# Altium PCB RCFU_V2.0.PcbDoc
Units mm, origin at the board's own origin, x right, y up, seen from the top; angles counter-clockwise.
Board outline 80 x 50 mm, 2 copper layers (Top Layer, Bottom Layer), stack 1.58 mm thick; 68 components, 53 nets, 357 pads, 300 vias.
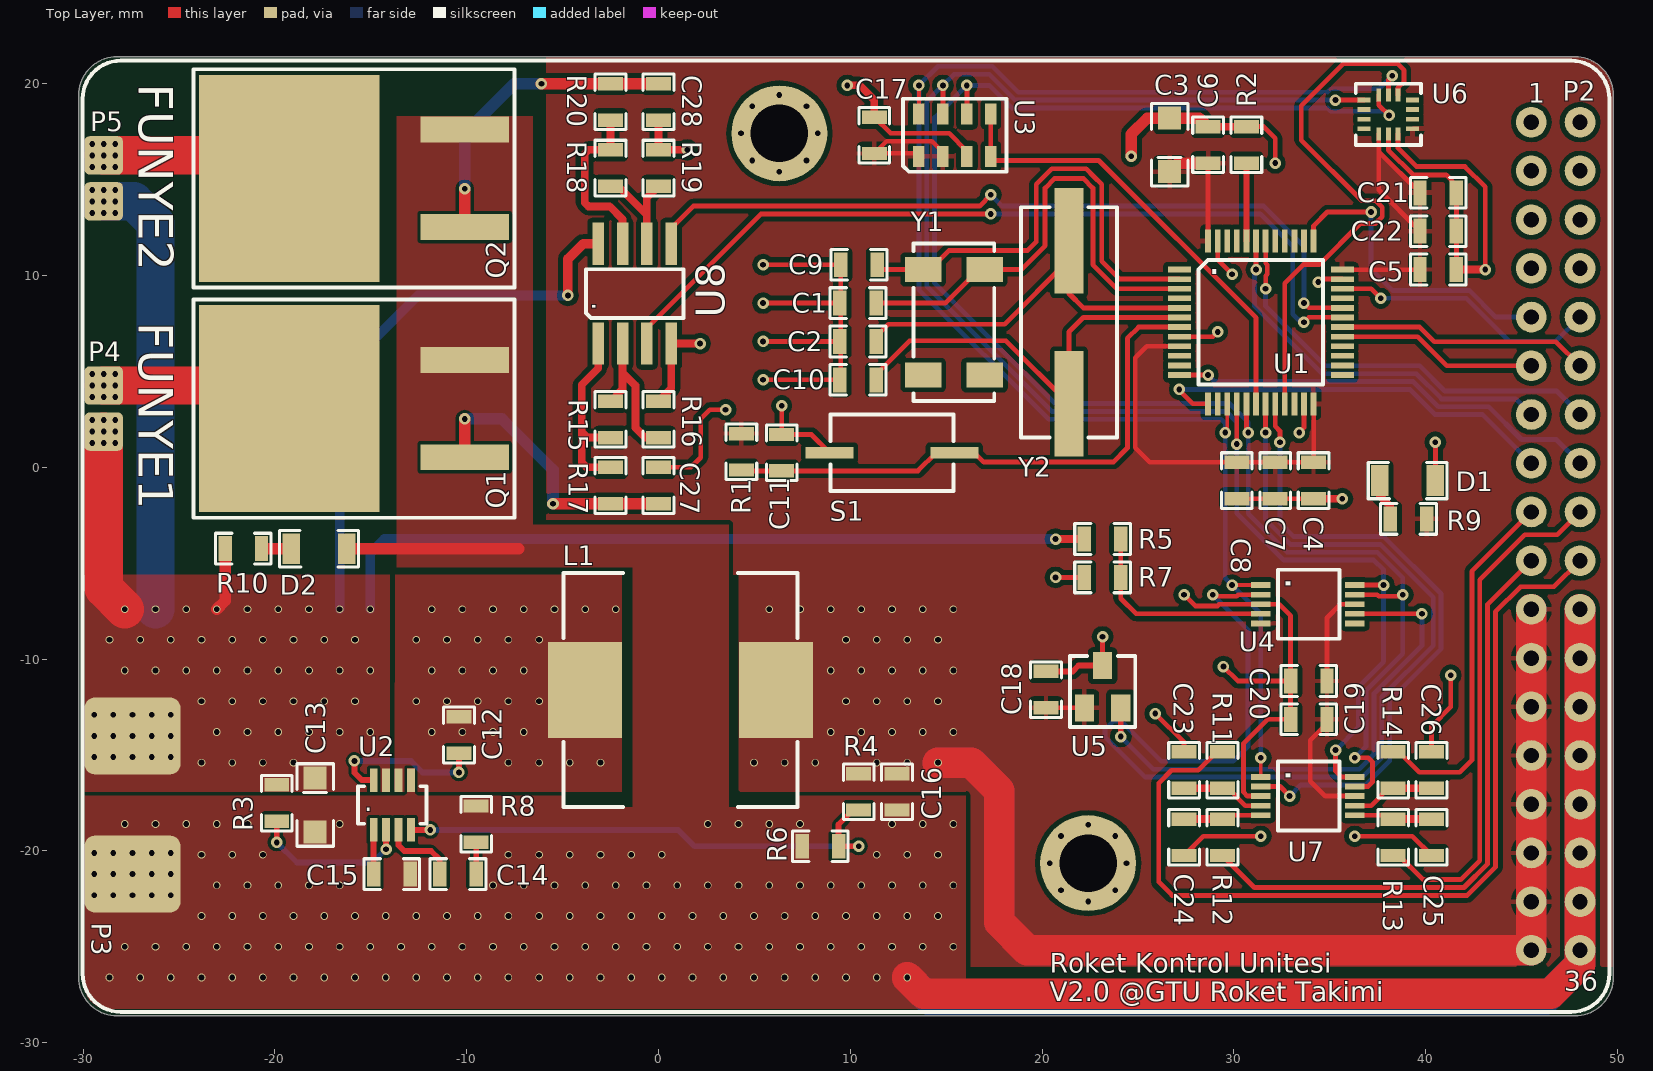
[diagram p0: Top Layer view]
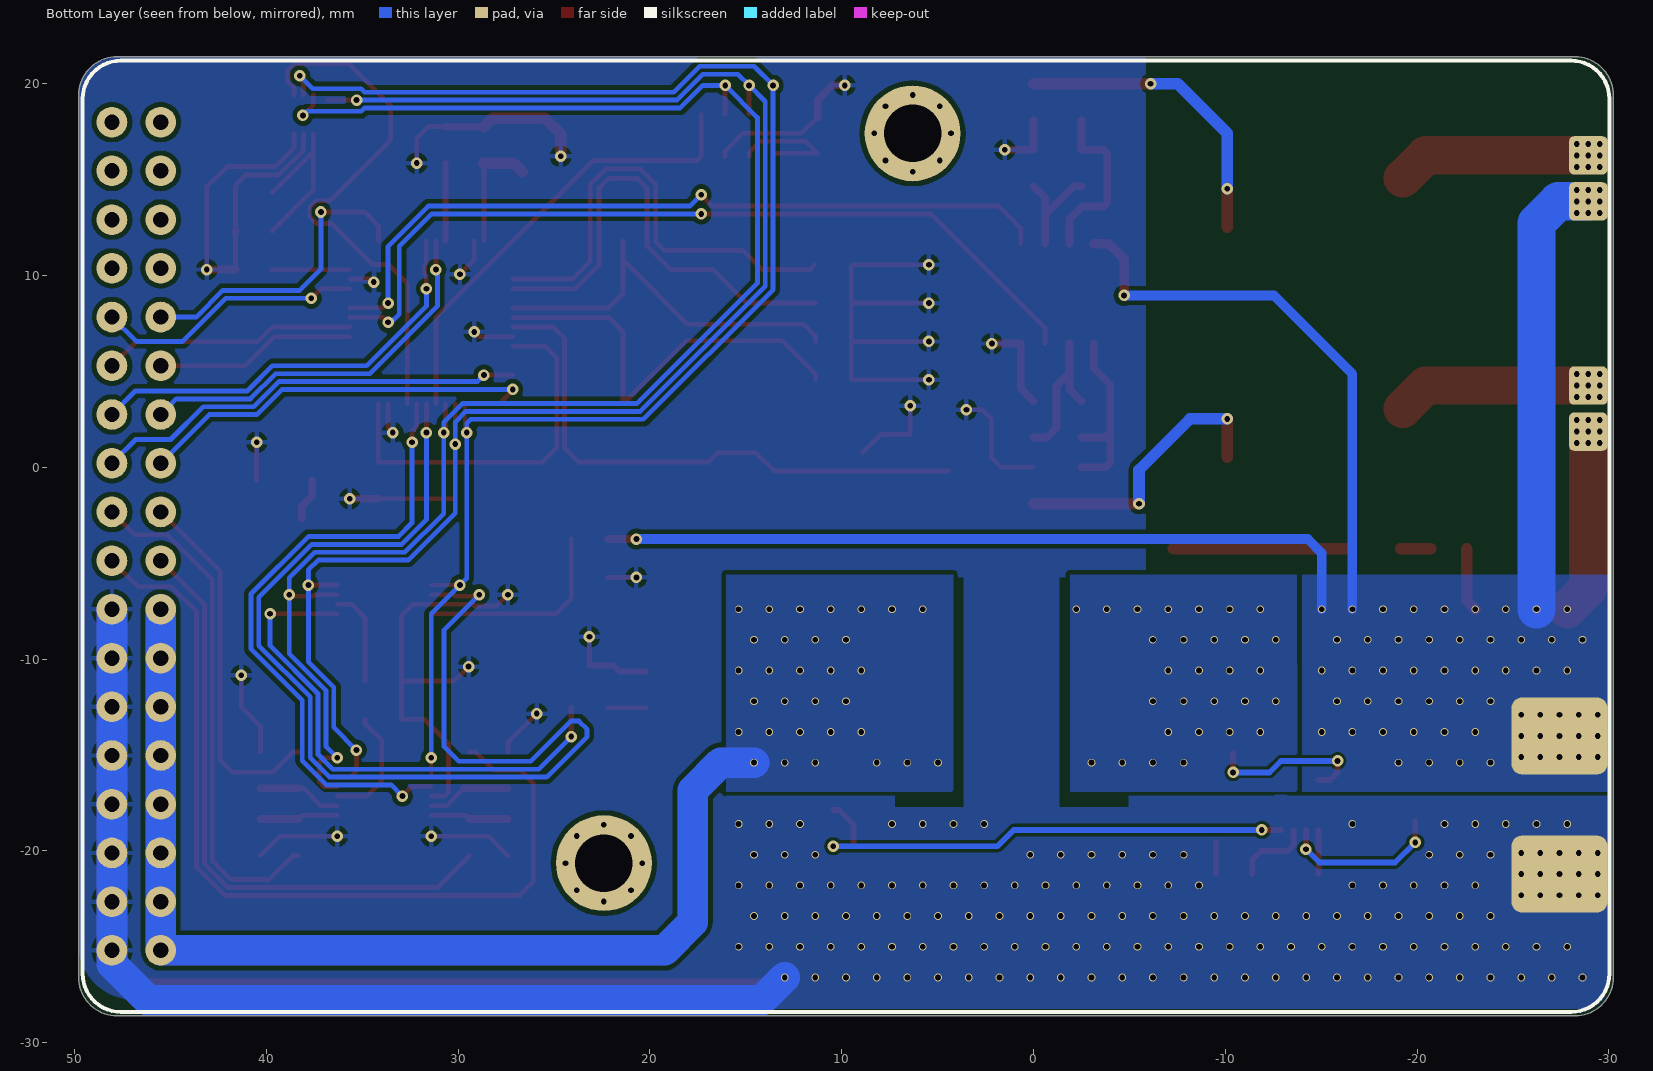
[diagram p1: Bottom Layer view, seen from below]
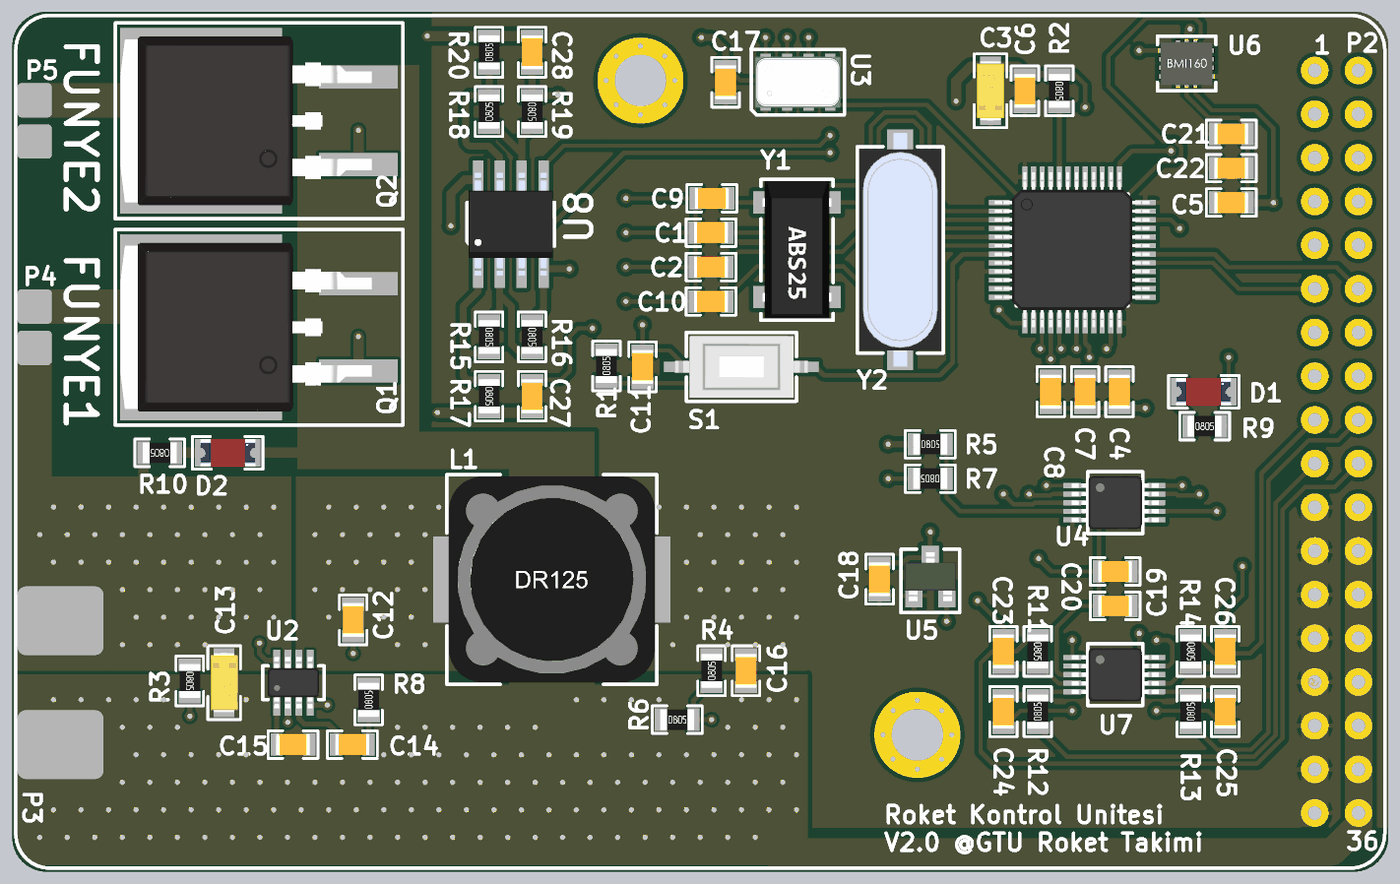
[diagram p2: 3D render of the assembled board from above, using the file's embedded part models]

## Layer stack, top to bottom
Top Solder: solder mask 0.01, Solder Resist, Dk 3.5
Top Layer: signal copper 0.01
Dielectric 1: dielectric 1.56, FR-4, Dk 4.8
Bottom Layer: signal copper 0.01
Bottom Solder: solder mask 0.01, Solder Resist, Dk 3.5

## Board outline
-30.224,-26.598 -30.224,19.402 cw(c-28.224,19.402) -28.224,21.402 47.776,21.402 cw(c47.776,19.402) 49.776,19.402 49.776,-26.598 cw(c47.776,-26.598) 47.776,-28.598 -28.224,-28.598 cw(c-28.224,-26.598)

## Design rules (kind name [scope] priority, off if disabled: settings)
Clearance PlaneCl [InNamedPolygon('gndplane','vccplane')] p1: gap=0.25 ignorepadtopadclearanceinfootprint=FALSE
Clearance [All] p2: gap=0.16 ignorepadtopadclearanceinfootprint=FALSE
Clearance POWER_CLE [InNamedPolygon('VBAT_L01_P018','VSS1_L01_P020','NETC12_2_L01_P022','SENSE_BUS_L01_P024','VSS1_L01_P026','VSS1_L01_P042')] p3: gap=0.2 ignorepadtopadclearanceinfootprint=FALSE
ComponentClearance [All] p1: gap=0 collisioncheckmode=3 verticalgap=2540 showdistances=FALSE
DiffPairsRouting DiffPair_DiffPairsRouting [InDifferentialPair ('OSC_IN')] p1: maxlimit=0.5 minlimit=0.16 mostfreqgap=0.2 toplayer_minwidth=0.16 toplayer_maxwidth=0.5 toplayer_prefwidth=0.3 bottomlayer_minwidth=0.16 bottomlayer_maxwidth=0.5 bottomlayer_prefwidth=0.3 maxuncoupledlength=12.7
DiffPairsRouting [All] p2: maxlimit=0.5 minlimit=0.16 mostfreqgap=0.2 toplayer_minwidth=0.16 toplayer_maxwidth=0.5 toplayer_prefwidth=0.3 bottomlayer_minwidth=0.16 bottomlayer_maxwidth=0.5 bottomlayer_prefwidth=0.3 maxuncoupledlength=12.7
PolygonConnect POWER_POL [All vs IsNamedPolygon('VBAT_L01_P018','VSS1_L01_P020','NETC12_2_L01_P022','SENSE_BUS_L01_P024','VSS1_L01_P026','VSS1_L01_P042')] p1: connectstyle=Direct reliefconductorwidth=0.254 reliefentries=4 polygonreliefangle="90 Angle" airgapwidth=0.254
PolygonConnect [All] p2: connectstyle=Relief reliefconductorwidth=0.254 reliefentries=4 polygonreliefangle="90 Angle" airgapwidth=0.254
RoutingTopology [All] p1: topology=Daisy_Balanced
RoutingVias [All] p1: holewidth=0.4 width=0.8 viastyle="Through Hole" minholewidth=0.3 minwidth=0.6 maxholewidth=2 maxwidth=4
SolderMaskExpansion [All] p1: expansion=0
Width [All] p1: maxlimit=5 minlimit=0.16 preferedwidth=0.3
27 further rules are at their usual default settings.

## Classes and differential pairs
component class RFCU_V2.0: P2
component class Sensor: C17 C18 C19 C20 C21 C22 C23 C24 C25 C26 R11 R12 R13 R14 U3 U4 U5 U6 U7
component class Power: C12 C13 C14 C15 C16 D1 D2 D? L1 P3 R3 R4 R5 R6 R7 R8 R9 R10 R? U2
component class MCU: C1 C2 C3 C4 C5 C6 C7 C8 C9 C10 C11 R1 R2 S1 U1 Y1 Y2
component class Ejection: C27 C28 P4 P5 Q1 Q2 R15 R16 R17 R18 R19 R20 U8

## Components (designator, comment, footprint, x,y, rotation, side; value= is the part's Value field where it differs from the comment)
C1 "Cap" 0805-CAP 10.402,8.559 r180 top value=100nF
C2 "Cap" 0805-CAP 10.402,6.559 r180 top value=100nF
C3 "Cap Pol1" "Tantalum A-Case" 26.652,16.809 r90 top value=4.7uF
C4 "Cap" 0805-CAP 34.152,-0.691 r90 top value=100nF
C5 "Cap" 0805-CAP 40.652,10.309 r180 top value=100nF
C6 "Cap" 0805-CAP 28.652,16.809 r270 top value=100nF
C7 "Cap" 0805-CAP 32.152,-0.691 r90 top value=100nF
C8 "Cap" 0805-CAP 30.152,-0.691 r90 top value=1uF
C9 "Cap" 0805-CAP 10.452,10.559 r180 top value=100nF
C10 "Cap" 0805-CAP 10.402,4.559 r180 top value=100nF
C11 "Cap" 0805-CAP 6.422,0.759 r270 top value=1uF
C12 "Cap" 0805-CAP -10.403,-13.958 r90 top value=3.3nF
C13 "Cap Pol1" "Tantalum A-Case" -17.903,-17.608 r270 top value=10uF
C14 "Cap" 0805-CAP -10.453,-21.208 r0 top value=3.3nF
C15 "Cap" 0805-CAP -13.903,-21.208 r0 top value=0.1uF
C16 "Cap" 0805-CAP 12.437,-16.918 r270 top value=3.3nF
C17 "Cap" 0805-CAP 11.252,17.309 r90 top value=100nF
C18 "Cap" 0805-CAP 20.202,-11.591 r90 top value=0.1uF
C19 "Cap" 0805-CAP 33.902,-13.141 r180 top value=0.1uF
C20 "Cap" 0805-CAP 33.902,-11.141 r180 top value=0.1uF
C21 "Cap" 0805-CAP 40.652,14.309 r0 top value=100nF
C22 "Cap" 0805-CAP 40.652,12.309 r0 top value=100nF
C23 "Cap" 0805-CAP 27.402,-15.791 r90 top value=100nF
C24 "Cap" 0805-CAP 27.402,-19.291 r270 top value=100nF
C25 "Cap" 0805-CAP 40.302,-19.291 r270 top value=100nF
C26 "Cap" 0805-CAP 40.302,-15.791 r90 top value=100nF
C27 "Cap" 0805-CAP 0,-0.95 r270 top value=10uF
C28 "Cap" 0805-CAP 0,19.05 r90 top value=10uF
D1 "LED0" "1206-LED RED" 39.052,-0.691 r0 top
D2 "LED0" "1206-LED RED" -17.698,-4.241 r0 top
L1 "Inductor" DR125 1.147,-11.608 r0 top value=10uH
P2 "Header 18X2" "2X18 2.54mm Headers" 46.776,-3.598 r0 top locked
P3 "BatteryIn" "Battery 1" -27.423,-17.608 r90 top
P4 "Header 2" "Battery 2" -28.923,3.06 r270 top
P5 "Header 2" "Battery 2" -28.923,15.06 r270 top
Q1 "IRF540" TO-263-AA -10.1,3.06 r90 top
Q2 "IRF540" TO-263-AA -10.1,15.06 r90 top
R1 "Res1" 0805-RES 4.322,0.809 r90 top value=10K
R2 "Res1" 0805-RES 30.652,16.809 r270 top value=10K
R3 "Res1" 0805-RES -19.903,-17.508 r270 top value=100K
R4 "Res1" 0805-RES 10.437,-16.918 r90 top value=26.1k
R5 "Res1" 0805-RES 23.152,-3.741 r0 top value=1K
R6 "Res1" 0805-RES 8.437,-19.758 r0 top value=10k
R7 "Res1" 0805-RES 23.152,-5.741 r180 top value=1K
R8 "Res1" 0805-RES -9.503,-18.608 r90 top value=5.6k
R9 "Res1" 0805-RES 39.102,-2.691 r0 top value=1K
R10 "Res1" 0805-RES -21.648,-4.241 r180 top value=1K
R11 "Res1" 0805-RES 29.402,-15.791 r270 top value=10k
R12 "Res1" 0805-RES 29.402,-19.291 r90 top value=10k
R13 "Res1" 0805-RES 38.302,-19.291 r90 top value=10k
R14 "Res1" 0805-RES 38.302,-15.791 r270 top value=10k
R15 "Res1" 0805-RES -2.5,2.5 r270 top value=10k
R16 "Res1" 0805-RES 0,2.5 r270 top value=10k
R17 "Res1" 0805-RES -2.5,-0.95 r270 top value=10k
R18 "Res1" 0805-RES -2.5,15.6 r90 top value=10k
R19 "Res1" 0805-RES 0,15.6 r270 top value=10k
R20 "Res1" 0805-RES -2.5,19.05 r90 top value=10k
S1 "SW-PB" "3x6x2.5mm Tacticle Push Button" 12.172,0.759 r180 top
U1 "STM32F103C8T6" LQFP-48 31.402,7.559 r0 top locked
U2 "MP1472" TSOP-23 -13.878,-17.608 r0 top
U3 "MS5611" MS5611-01BA03 15.452,17.309 r90 top
U4 "ADS1118" MSOP10 33.902,-7.141 r270 top
U5 "MCP9700" "SOT23-3 (TO-236AB)" 23.152,-11.441 r0 top
U6 "BMI160 IMU Sensor" BMI160 38.052,18.397 r0 top
U7 "ADS1118" MSOP10 33.902,-17.141 r270 top
U8 "LM358" SOIC-8 -1.24,9.05 r90 top
Y1 "32.768 kHz" "MC-306 SMD" 15.402,7.559 r270 top
Y2 "8 MHz" "HC49 Crystal SMD" 21.402,7.559 r270 top

## Footprints (in the part's own frame and the unit in brackets; to place one, negate y for a bottom-side part, rotate by r counter-clockwise, add the part's x,y. Pads: shape width x height; smd on the part's side, far side on the other; paste and mask are expansions set on the pad)
"2X18 2.54mm Headers" [mm] "2X18 2.54mm Headers"
  round 1.6 hole 0.8: 1(-1.27,21.59) 2(1.27,21.59) 3(-1.27,19.05) 4(1.27,19.05) 5(-1.27,16.51) 6(1.27,16.51) 7(-1.27,13.97) 8(1.27,13.97) 9(-1.27,11.43) 10(1.27,11.43) 11(-1.27,8.89) 12(1.27,8.89) 13(-1.27,6.35) 14(1.27,6.35) 15(-1.27,3.81) 16(1.27,3.81) 17(-1.27,1.27) 18(1.27,1.27) 19(-1.27,-1.27) 20(1.27,-1.27) 21(-1.27,-3.81) 22(1.27,-3.81) 23(-1.27,-6.35) 24(1.27,-6.35) 25(-1.27,-8.89) 26(1.27,-8.89) 27(-1.27,-11.43) 28(1.27,-11.43) 29(-1.27,-13.97) 30(1.27,-13.97) 31(-1.27,-16.51) 32(1.27,-16.51) 33(-1.27,-19.05) 34(1.27,-19.05) 35(-1.27,-21.59) 36(1.27,-21.59)
"3x6x2.5mm Tacticle Push Button" [mm]
  rect 2.5x0.6 smd: 1(-3.25,0) 2(3.25,0)
  silkscreen extent -3.2,-2 3.2,2, body extent -3.89,-1.79 3.89,1.79, height 2.54
0805-CAP [mm]
  rect 0.7x1.3 smd: 1(-0.95,0) 2(0.95,0)
  silkscreen extent -1.45,-0.8 1.45,0.8, body extent -1,-0.62 1,0.63, height 0.85
0805-RES [mm]
  rect 0.7x1.3 smd: 1(-0.95,0) 2(0.95,0)
  silkscreen extent -1.45,-0.8 1.45,0.8, body extent -1,-0.6 1,0.6, height 0.4
"1206-LED RED" [mm]
  rect 0.9x1.6 smd: 1(-1.45,0) 2(1.45,0)
  silkscreen extent -2.05,-0.95 2.05,0.95, body extent -1.6,-0.8 1.6,0.8, height 1.11
"Battery 1" [mm] "Battery 1"
  round 0.4 hole 0.3: 1(-4.7,-2) 1(-4.7,-1) 1(-4.7,0) 1(-4.7,1) 1(-4.7,2) 1(-3.6,-2) 1(-3.6,-1) 1(-3.6,0) 1(-3.6,1) 1(-3.6,2) 1(-2.5,-2) 1(-2.5,-1) 1(-2.5,0) 1(-2.5,1) 1(-2.5,2) 2(2.5,-2) 2(2.5,-1) 2(2.5,0) 2(2.5,1) 2(2.5,2) 2(3.6,-2) 2(3.6,-1) 2(3.6,0) 2(3.6,1) 2(3.6,2) 2(4.7,-2) 2(4.7,-1) 2(4.7,0) 2(4.7,1) 2(4.7,2)
  rrect25% 4x5 smd: 1(-3.6,0) 2(3.6,0)
  rrect25% 4x5 smd far side: 1(-3.6,0) 2(3.6,0)
"Battery 2" [mm] "Battery 1"
  round 0.4 hole 0.3: 1(-1.8,-0.6) 1(-1.8,0) 1(-1.8,0.6) 1(-1.2,0.6) 1(-1.2,0) 1(-1.2,-0.6) 1(-0.6,0.6) 1(-0.6,0) 1(-0.6,-0.6) 2(0.6,0.6) 2(0.6,0) 2(0.6,-0.6) 2(1.2,0.6) 2(1.2,0) 2(1.2,-0.6) 2(1.8,-0.6) 2(1.8,0) 2(1.8,0.6)
  rrect25% 2x2 smd: 1(-1.2,0) 2(1.2,0)
  rrect25% 2x2 smd far side: 1(-1.2,0) 2(1.2,0)
BMI160 [mm] "BMI160 Bosch IMU Sensor"
  rect 0.675x0.25 smd mask+0.05: 1(-1.262,0.75) 2(-1.262,0.25) 3(-1.262,-0.25) 4(-1.262,-0.75) 8(1.262,-0.75) 9(1.262,-0.25) 10(1.262,0.25) 11(1.262,0.75)
  rect 0.25x0.675 smd mask+0.05: 5(-0.5,-1.012) 6(0,-1.012) 7(0.5,-1.012) 12(0.5,1.012) 13(0,1.012) 14(-0.5,1.012)
  silkscreen extent -1.7,-1.6 1.7,1.6, body extent -1.5,-1.25 1.5,1.25, height 0.83
DR125 [mm] "DR125 Series"
  rect 3.85x5 smd: 1(-4.975,0) 2(4.975,0)
  silkscreen extent -6.1,-6.1 6.1,6.1, body extent -6,-6 6,6, height 5.92
"HC49 Crystal SMD" [mm]
  rect 5.5x1.5 smd: 1(-4.25,0) 2(4.25,0)
  silkscreen extent -6,-2.5 6,2.5, body extent -6.79,-2.4 6.79,2.4, height 3.85
LQFP-48 [mm] "48 Pin LQPF Package"
  rect 1.2x0.3 smd: 1(-4.25,2.75) 2(-4.25,2.25) 3(-4.25,1.75) 4(-4.25,1.25) 5(-4.25,0.75) 6(-4.25,0.25) 7(-4.25,-0.25) 8(-4.25,-0.75) 9(-4.25,-1.25) 10(-4.25,-1.75) 11(-4.25,-2.25) 12(-4.25,-2.75) 25(4.25,-2.75) 26(4.25,-2.25) 27(4.25,-1.75) 28(4.25,-1.25) 29(4.25,-0.75) 30(4.25,-0.25) 31(4.25,0.25) 32(4.25,0.75) 33(4.25,1.25) 34(4.25,1.75) 35(4.25,2.25) 36(4.25,2.75)
  rect 0.3x1.2 smd: 13(-2.75,-4.25) 14(-2.25,-4.25) 15(-1.75,-4.25) 16(-1.25,-4.25) 17(-0.75,-4.25) 18(-0.25,-4.25) 19(0.25,-4.25) 20(0.75,-4.25) 21(1.25,-4.25) 22(1.75,-4.25) 23(2.25,-4.25) 24(2.75,-4.25) 37(2.75,4.25) 38(2.25,4.25) 39(1.75,4.25) 40(1.25,4.25) 41(0.75,4.25) 42(0.25,4.25) 43(-0.25,4.25) 44(-0.75,4.25) 45(-1.25,4.25) 46(-1.75,4.25) 47(-2.25,4.25) 48(-2.75,4.25)
  silkscreen extent -3.25,-3.25 3.25,3.25, body extent -4.5,-4.5 4.5,4.5, height 1.5
"MC-306 SMD" [mm] "MC-306 Crystal"
  rect 1.3x1.9 smd: 1(-2.75,-1.6) 2(2.75,-1.6) 3(2.75,1.6) 4(-2.75,1.6)
  silkscreen extent -4.1,-2.1 4.1,2.1, body extent -4,-2 4,2, height 2.66
MS5611-01BA03 [mm] "MS5611 Barometer Sensor I2C-SPI"
  rect 1.1x0.6 smd: 1(-1.1,1.875) 2(-1.1,0.625) 3(-1.1,-0.625) 4(-1.1,-1.875) 5(1.1,-1.875) 6(1.1,-0.625) 7(1.1,0.625) 8(1.1,1.875)
  silkscreen extent -1.9,-2.7 1.9,2.7, body extent -1.5,-2.5 1.5,2.5, height 1
MSOP10 [mm] "MSOP 10 Pin Package"
  rect 0.3x1.02 smd: 1(-1,-2.5) 2(-0.5,-2.5) 3(0,-2.5) 4(0.5,-2.5) 5(1,-2.5) 6(1,2.4) 7(0.5,2.4) 8(0,2.4) 9(-0.5,2.4) 10(-1,2.4)
  silkscreen extent -1.8,-1.6 1.8,1.6, body extent -1.55,-2.52 1.55,2.53, height 1.05
SOIC-8 [mm] "SOIC-8 Package"
  rect 2.2x0.6 smd: 1(-2.6,1.905) 2(-2.6,0.635) 3(-2.6,-0.635) 4(-2.6,-1.905) 5(2.6,-1.905) 6(2.6,-0.635) 7(2.6,0.635) 8(2.6,1.905)
  silkscreen extent -1.27,-2.54 1.27,2.54, body extent -3,-2.45 3,2.45, height 1.5
"SOT23-3 (TO-236AB)" [mm] "SOT23 3 Pin"
  rect 1x1.4 smd: 1(-0.95,-1.1) 2(0.95,-1.1) 3(0,1.1)
  silkscreen extent -1.7,-2.1 1.7,1.6, body extent -1.5,-1.42 1.5,1.42, height 1.2
"Tantalum A-Case" [mm] "Tantalum A-Case"
  rect 1.2x1.2 smd: 1(-1.4,0) 2(1.4,0)
  silkscreen extent -2.15,-0.95 2.15,0.95, body extent -1.73,-0.8 1.73,0.8, height 1.64
TO-263-AA [mm] "TO-263-AA Package"
  rect 10.8x9.4 smd: 1(0,9.15)
  rect 1.35x4.6 smd: 2(-2.54,0) 3(2.54,0)
  silkscreen extent -5.69,-2.6 5.69,14.14, body extent -4.91,-0.77 4.91,13.83, height 4.22
TSOP-23 [mm] "TSOP-23 8 Pin Package"
  rect 0.4x1.22 smd: 1(-0.975,-1.3) 2(-0.325,-1.3) 3(0.325,-1.3) 4(0.975,-1.3) 5(0.975,1.3) 6(0.325,1.3) 7(-0.325,1.3) 8(-0.975,1.3)
  silkscreen extent -1.79,-0.97 1.79,0.97, body extent -1.5,-1.5 1.5,1.5, height 1.1

## Part data
C1 C2 C4 C5 C6 C7 C8 C9 C10 C11 C12 C14 C15 C16 C17 C18 C19 C20 C21 C22 C23 C24 C25 C26 C27 C28: "Capacitor", LatestRevisionDate=17-Jul-2002, LatestRevisionNote="Re-released for DXP Platform.", PackageDescription="Radial Cap, Thru-Hole; 2 Leads; 0.3 in Pin Spacing", PackageReference=RAD-0.3, Published=8-Jun-2000, Publisher="Altium Limited"
C3 C13: "Polarized Capacitor (Radial)", LatestRevisionDate=17-Jul-2002, LatestRevisionNote="Re-released for DXP Platform.", PackageDescription="Polarized Capacitor (Radial); 2 Leads", PackageReference=RB7.6-15, Published=8-Jun-2000, Publisher="Altium Limited"
D1 D2: "Typical INFRARED GaAs LED", LatestRevisionDate=08-Jul-2005, LatestRevisionNote="Mech Layer 1 removed.", PackageDescription="LED; 2 Leads", PackageReference=LED-0, Published=8-Jun-2000, Publisher="Altium Limited"
P2: "Header, 18-Pin, Dual row", LatestRevisionDate=17-Jul-2002, LatestRevisionNote="Re-released for DXP Platform.", Publisher="Altium Limited"
P3: library part "Header 2", "Header, 2-Pin", LatestRevisionDate=17-Jul-2002, LatestRevisionNote="Re-released for DXP Platform.", Publisher="Altium Limited"
P4 P5: "Header, 2-Pin", LatestRevisionDate=17-Jul-2002, LatestRevisionNote="Re-released for DXP Platform.", Publisher="Altium Limited"
Q1 Q2: library part MOSFET-N, "N-Channel MOSFET", LatestRevisionDate=17-Jul-2002, LatestRevisionNote="Re-released for DXP Platform.", PackageDescription="TO, Flat Index; 3 In-Line, Axial Leads; Body Dia. 4.6mm; Lead Dia. 0.5 mm (max)", PackageReference=E3, PackageVersion=1995/1996, Published=8-Jun-2000, Publisher="Altium Limited"
R1 R2 R3 R4 R5 R6 R7 R8 R9 R10 R11 R12 R13 R14 R15 R16 R17 R18 R19 R20: "Resistor", LatestRevisionDate=17-Jul-2002, LatestRevisionNote="Re-released for DXP Platform.", PackageDescription="Axial Device, Thru-Hole; 2 Leads; 0.3 in Pin Spacing", PackageReference=AXIAL-0.3, Published=8-Jun-2000, Publisher="Altium Limited"
S1: "Switch", LatestRevisionDate=17-Jul-2002, LatestRevisionNote="Re-released for DXP Platform.", PackageDescription="Switch; 2 Leads", PackageReference=SPST-2, Published=24-Mar-1999, Publisher="Altium Limited"
U1: library part STM32F103C8T6-LQPF48, "STM32F103C8T6 LQPF-48"
U2: "MP1472 2A 18V Step-Down Conventor"
U3: "MS5611 Barometer I2C/SPI"
U4 U7: "ADS1118 SPI 4 Channel ADC"
U5: "MCP9700 Linear Temperature Sensor"
U6: "BoschTech BMI160 6 Axis IMU Sensor"
U8: "LM358 OPAMP"
Y1 Y2: library part XTAL, "Crystal Oscillator", LatestRevisionDate=17-Jul-2002, LatestRevisionNote="Re-released for DXP Platform.", PackageDescription="Crystal, Thru-Hole; 2 Leads; Body 3.1 x 8.2 mm (Dia.xH)", PackageReference=R38, Published=8-Jun-2000, Publisher="Altium Limited"
L1: Code_IEC=1005, Code_JEITA=0402, LatestRevisionDate=29-May-2009, LatestRevisionNote="IPC-7351 Footprint Added.", PackageDescription="Chip Inductor", PackageReference=0402-A, Published=8-Jun-2000, Publisher="Altium Limited"

## Free pads (board coordinates)
  round 0.4 hole 0.3: ""(4.302,17.409) ""(4.888,15.995) ""(4.888,18.823) ""(6.302,15.409) ""(6.302,19.409) ""(7.716,15.995) ""(7.716,18.823) ""(8.302,17.409) ""(20.402,-20.641) ""(20.988,-22.055) ""(20.988,-19.227) ""(22.402,-22.641) ""(22.402,-18.641) ""(23.816,-22.055) ""(23.816,-19.227) ""(24.402,-20.641)
  round 5 hole 3: ""(6.302,17.409) ""(22.402,-20.641)

## Via types
v1: diameter 0.4, hole 0.3, Top Layer to Bottom Layer, 229 vias
v2: diameter 0.6, hole 0.3, Top Layer to Bottom Layer, 71 vias

## Nets (pads, with @x,y where several pads share a name; then routed paths per layer and width w, separated by ;. In a path a pad name is that pad's centre, name@x,y a point inside that pad or via, vN(x,y) a via of type N, cw(c..) or ccw(c..) an arc to the next point about the centre after c; other vN are vias at no path point)
ADCIN_0: P2.20 R11.1 | length 46.4
  Top Layer w0.25: R11.1 29.102,-14.841 28.145,-15.798 26.745,-15.798 26.076,-16.467 26.076,-21.615 26.779,-22.318 42.165,-22.318 43.636,-20.847 43.636,-7.538 44.946,-6.228 46.686,-6.228 P2.20
ADCIN_1: P2.19 R12.1 | length 31.8
  Top Layer w0.25: R12.1 31.069,-21.908 41.995,-21.908 43.226,-20.678 43.226,-7.148 P2.19
ADCIN_2: P2.18 R13.1 | length 26.8
  Top Layer w0.25: R13.1 38.602,-20.241 39.859,-21.498 41.826,-21.498 42.816,-20.508 42.816,-5.868 45.166,-3.518 46.856,-3.518 P2.18
ADCIN_3: P2.17 R14.1 | length 19
  Top Layer w0.25: R14.1 38.602,-14.841 39.659,-15.898 41.776,-15.898 42.406,-15.268 42.406,-5.428 P2.17
ADCOUT_0: C23.1 R11.2 U7.4 | length 4.4
  Top Layer w0.25: R11.2@29.702,-16.741 30.602,-17.641 U7.4
  Top Layer w0.4: C23.1 R11.2 R11.2@29.702,-16.741
ADCOUT_1: C24.1 R12.2 U7.5 | length 4.1
  Top Layer w0.25: R12.2 29.602,-18.141 U7.5
  Top Layer w0.4: C24.1 R12.2
ADCOUT_2: C25.1 R13.2 U7.6 | length 4.1
  Top Layer w0.25: U7.6 38.102,-18.141 R13.2
  Top Layer w0.4: R13.2 C25.1
ADCOUT_3: C26.1 R14.2 U7.7 | length 4.4
  Top Layer w0.25: U7.7 37.152,-17.641 38.052,-16.741 R14.2
  Top Layer w0.4: R14.2 C26.1
Batt: R5.2 R7.1 U4.4 | length 10.7
  Top Layer w0.25: R5.2 R7.1 24.102,-6.841 24.902,-7.641 U4.4
BOOT0: R2.2 U1.44 | length 4
  Top Layer w0.3: U1.44 R2.2
CS1: U1.18 U3.4 U3.5 | length 24
  Top Layer w0.25: U3.5 U3.4 17.547,15.989 20.316,15.989 20.321,15.994 22.957,15.994 31.152,7.799 U1.18
CS2: U1.19 U4.2 | length 62.1
  Top Layer w0.25: v2(28.902,-6.641) 28.987,-6.726 30.144,-6.726 30.229,-6.641 U4.2 ; v2(31.652,1.809) U1.19
  Bottom Layer w0.25: v2(28.902,-6.641) 30.732,-8.471 30.732,-14.561 29.962,-15.331 26.222,-15.331 24.122,-13.231 23.702,-13.231 23.272,-13.661 23.272,-14.038 25.385,-16.151 36.699,-16.151 37.712,-15.138 37.712,-11.97 40.387,-9.295 40.387,-6.776 37.632,-4.021 32.942,-4.021 31.652,-2.731 v2(31.652,1.809)
CS3: U1.20 U7.2 | length 33.7
  Top Layer w0.25: U7.2 32.402,-16.641 v2(32.902,-17.141) ; U1.20 32.152,2.136 32.402,1.886 v2(32.402,1.309)
  Bottom Layer w0.25: v2(32.402,1.309) 32.402,-2.901 33.111,-3.611 37.802,-3.611 40.797,-6.606 40.797,-9.465 38.122,-12.14 38.122,-15.308 36.869,-16.561 33.482,-16.561 v2(32.902,-17.141)
CS4: U1.21 U6.12 | length 28.6
  Top Layer w0.25: U1.21 32.652,9.599 33.622,10.569 34.452,10.569 36.592,12.709 37.379,12.709 37.737,13.067 37.737,13.551 37.394,13.894 36.677,13.894 33.512,17.059 33.512,18.849 35.702,21.039 38.532,21.039 38.872,20.699 38.872,20.099 38.552,19.779 U6.12
LoadIN: C13.1 P3.2 P4.2 P5.2 R3.1 R5.1 R10.2 U2.7 U8.8 | length 106.5
  Top Layer w0.4: v2(20.702,-3.741) R5.1
  Top Layer w0.5: v2(-4.723,8.957) -4.723,10.857 -3.93,11.65 U8.8
  Top Layer w0.6: v1(-23.025,-7.398) -22.598,-6.971 R10.2
  Top Layer w2: P4.2@-28.923,1.86 -28.923,-6.3 v1(-27.825,-7.398)
  Bottom Layer w0.5: v1(-16.625,-7.398) -16.625,4.87 -12.538,8.957 v2(-4.723,8.957) ; v1(-15.025,-7.398) -15.025,-4.468 -14.298,-3.741 v2(20.702,-3.741)
  Bottom Layer w2: P5.2@-28.923,13.86 -28.323,13.86 -27.35,13.86 -26.225,12.735 v1(-26.225,-7.398)
  other v1: -23.825,-15.398 -22.225,-15.398 -20.625,-15.398 -19.025,-15.398 -23.025,-13.798 -21.425,-13.798 -19.825,-13.798 -18.225,-13.798 -16.625,-13.798 -15.025,-13.798 -23.825,-12.198 -22.225,-12.198 -20.625,-12.198 -19.025,-12.198 -17.425,-12.198 -15.825,-12.198 -27.825,-10.598 -26.225,-10.598 -24.625,-10.598 -23.025,-10.598 -21.425,-10.598 -19.825,-10.598 -18.225,-10.598 -16.625,-10.598 -15.025,-10.598 -28.625,-8.998 -27.025,-8.998 -25.425,-8.998 -23.825,-8.998 -22.225,-8.998 -20.625,-8.998 -19.025,-8.998 -17.425,-8.998 -15.825,-8.998 -24.625,-7.398 -21.425,-7.398 -19.825,-7.398 -18.225,-7.398
LoadOUT_1: P5.1 Q2.1 | length 10.2
  Top Layer w2: P5.1@-28.923,16.26 -28.323,16.26 -20.45,16.26 Q2.1
LoadOUT_2: P4.1 Q1.1 | length 10.2
  Top Layer w2: P4.1@-28.923,4.26 -28.323,4.26 -20.45,4.26 Q1.1
MISO: U1.16 U3.7 U4.10 U6.1 U7.10 | length 84
  Top Layer w0.25: U3.7 v2(14.827,19.909) ; v2(30.152,1.209) U1.16 ; v2(35.302,-14.741) 35.302,-15.841 35.602,-16.141 U7.10 ; v2@35.377,19.209 35.439,19.147 U6.1 ; U4.10 v2(37.802,-6.141)
  Bottom Layer w0.25: v2(35.289,19.147) 18.589,19.147 17.242,20.494 15.412,20.494 v2(14.827,19.909) 13.987,19.069 13.987,9.434 20.512,2.909 29.602,2.909 30.152,2.359 v2(30.152,1.209) 30.152,-2.391 32.602,-4.841 37.292,-4.841 37.802,-5.351 v2(37.802,-6.141) 37.802,-10.141 36.482,-11.461 36.482,-13.561 v2(35.302,-14.741)
MOSI: U1.17 U3.6 U4.9 U6.14 U7.9 | length 87.6
  Top Layer w0.25: U3.6 v2(16.077,19.909) ; U1.17 30.652,1.909 v2(30.752,1.809) ; U7.9 37.002,-16.641 37.222,-16.421 37.222,-15.361 37.002,-15.141 v2(36.302,-15.141) ; U4.9 37.475,-6.641 37.56,-6.726 38.717,-6.726 v2(38.802,-6.641) ; U6.14 37.552,18.884 v2(38.089,18.347)
  Bottom Layer w0.25: v2(36.302,-15.141) 36.892,-14.551 36.892,-11.631 38.802,-9.721 v2(38.802,-6.641) 38.802,-5.771 37.462,-4.431 32.772,-4.431 30.752,-2.411 v2(30.752,1.809) 30.752,2.339 29.772,3.319 20.682,3.319 14.397,9.604 14.397,18.229 v2(16.077,19.909) 17.247,19.909 18.42,18.737 34.872,18.737 35.047,18.562 37.874,18.562 v2(38.089,18.347)
NetC12_1: C12.1 U2.8 | length 8.5
  Top Layer w0.3: v2(-15.853,-15.308) -15.853,-15.928 -15.473,-16.308 U2.8 ; v2(-10.403,-15.908) C12.1
  Bottom Layer w0.3: v2(-15.853,-15.308) -12.903,-15.308 -12.303,-15.908 v2(-10.403,-15.908)
NetC12_2: C12.2 L1.1 U2.6
  other v1: -7.825,-15.398 -6.225,-15.398 -4.625,-15.398 -3.025,-15.398 -11.825,-13.798 -10.225,-13.798 -8.625,-13.798 -7.025,-13.798 -12.625,-12.198 -11.025,-12.198 -9.425,-12.198 -7.825,-12.198 -6.225,-12.198 -11.825,-10.598 -10.225,-10.598 -8.625,-10.598 -7.025,-10.598 -12.625,-8.998 -11.025,-8.998 -9.425,-8.998 -7.825,-8.998 -6.225,-8.998 -11.825,-7.398 -10.225,-7.398 -8.625,-7.398 -7.025,-7.398 -5.425,-7.398 -3.825,-7.398 -2.225,-7.398
NetC14_1: C14.1 U2.3 | length 4
  Top Layer w0.3: U2.3 -13.553,-19.708 -13.253,-20.008 -11.853,-20.008 -11.403,-20.458 C14.1
NetC14_2: C14.2 R8.1 | length 1.6
  Top Layer w0.3: C14.2 R8.1
NetC15_1: C15.1 U2.1 | length 2.3
  Top Layer w0.3: C15.1 U2.1
NetC27_2: C27.2 Q1.2 R17.2 | length 15
  Top Layer w0.6: Q1.2 v2(-10.1,2.52) ; v2(-5.5,-1.9) R17.2 C27.2
  Bottom Layer w0.6: v2(-10.1,2.52) -8.159,2.52 -5.5,-0.139 v2(-5.5,-1.9)
NetC28_2: C28.2 Q2.2 R20.2 | length 16.1
  Top Layer w0.6: Q2.2 v2(-10.1,14.52) ; v2(-6.1,20) R20.2 C28.2
  Bottom Layer w0.6: v2(-10.1,14.52) -10.1,17.42 -7.52,20 v2(-6.1,20)
NetD1_1: D1.1 R9.1 | length 2.2
  Top Layer w0.4: D1.1 37.602,-1.491 38.152,-2.041 R9.1
NetD2_1: D2.1 R10.1 | length 1.5
  Top Layer w0.6: R10.1 D2.1
NetR3_2: R3.2 U2.2 | length 8.5
  Top Layer w0.3: v2(-19.903,-19.558) R3.2 ; v2(-14.203,-19.908) U2.2
  Bottom Layer w0.3: v2(-19.903,-19.558) -18.853,-20.608 -14.903,-20.608 v2(-14.203,-19.908)
NetR4_1: R4.1 R6.2 U2.4 | length 27.2
  Top Layer w0.3: U2.4 v2(-11.903,-18.908) ; v2(10.437,-19.758) R6.2 9.387,-18.628 10.147,-17.868 R4.1
  Bottom Layer w0.3: v2(-11.903,-18.908) 1.027,-18.908 1.877,-19.758 v2(10.437,-19.758)
NetR15_1: R15.1 R16.2 U8.2 | length 7.8
  Top Layer w0.4: R15.1 -1.875,4.075 -1.875,4.936 ; U8.2 -1.875,4.936 ; R16.2 -0.689,1.55 -1.198,2.059 -1.198,4.259 -1.875,4.936
NetR15_2: R15.2 R17.1 U8.1 | length 9.8
  Top Layer w0.4: U8.1 -3.145,5.155 -4,4.3 -4,1.85 ; R17.1 -3.75,0 -4,0.25 -4,1.85 ; R15.2 -3.7,1.55 -4,1.85
NetR18_1: R18.1 R19.2 U8.6 | length 5.8
  Top Layer w0.4: R18.1 -2.1,14.65 -0.605,13.155 ; U8.6 -0.605,13.155 ; R19.2 -0.605,14.045 -0.605,13.155
NetR18_2: R18.2 R20.1 U8.7 | length 9.1
  Top Layer w0.4: R20.1 R18.2 -3.65,16.55 -3.85,16.35 -3.85,13.8 -3.65,13.6 -2.55,13.6 -1.875,12.925 U8.7
NetU1_31: U1.31 U8.3 | length 44
  Top Layer w0.235: v2(33.652,7.559) 33.902,7.809 U1.31
  Top Layer w0.25: U8.3 -0.605,7.257 5.347,13.209 v2(17.327,13.209)
  Bottom Layer w0.25: v2(17.327,13.209) 31.377,13.209 33.067,11.519 33.067,7.989 33.497,7.559 v2(33.652,7.559)
NetU1_32: U1.32 U8.5 | length 40.7
  Top Layer w0.235: v2(33.652,8.559) 33.902,8.309 U1.32
  Top Layer w0.25: U8.5 0.665,12.467 1.817,13.619 16.737,13.619 v2(17.327,14.209)
  Bottom Layer w0.25: v2(17.327,14.209) 17.917,13.619 31.547,13.619 33.652,11.514 v2(33.652,8.559)
OSC32_IN: C1.1 U1.3 Y1.4 | length 25
  Top Layer w0.25: C1.1 14.952,8.559 16.702,10.309 Y1.4 18.902,10.309 20.152,11.559 20.152,14.559 20.652,15.059 22.152,15.059 22.652,14.559 22.652,10.559 23.902,9.309 U1.3
OSC32_OUT: C9.1 U1.2 Y1.1 | length 24.5
  Top Layer w0.25: C9.1 11.652,10.309 Y1.1 14.152,10.309 15.152,11.309 19.251,11.309 19.692,11.75 19.692,14.75 20.501,15.559 22.303,15.559 22.727,15.134 23.112,14.75 23.112,10.75 24.053,9.809 U1.2
OSC_IN_N: C10.1 U1.6 Y2.2 | length 22.2
  Top Layer w0.25: C10.1 11.352,4.859 13.092,6.599 18.112,6.599 Y2.2 21.402,7.059 22.152,7.809 U1.6
OSC_IN_P: C2.1 U1.5 Y2.1 | length 20.8
  Top Layer w0.25: C2.1 11.352,6.832 11.979,7.459 18.052,7.459 Y2.1@21.402,10.809 ; Y2.1 Y2.1@21.402,10.809 ; U1.5 22.152,8.309 21.402,9.059 Y2.1@21.402,10.809
PWM3: P2.12 U1.30 | length 13.2
  Top Layer w0.25: U1.30 39.687,7.309 40.447,6.549 46.789,6.549 P2.12
PWM4: P2.11 U1.29 | length 10.5
  Top Layer w0.25: U1.29 39.587,6.809 41.104,5.292 P2.11
RESET: C11.2 R1.1 S1.1 U1.7 | length 29.6
  Top Layer w0.25: R1.1@4.422,-0.191 C11.2 13.522,-0.191 14.472,0.759 S1.1 16.472,0.759 16.959,0.272 23.717,0.272 24.449,1.005 24.449,6.727 25.032,7.309 U1.7
RX1_IN: P2.15 U1.13 | length 21.9
  Top Layer w0.25: v2@27.052,4.109 27.852,3.309 U1.13
  Bottom Layer w0.25: v2(27.152,4.059) 39.172,4.059 40.485,2.747 42.971,2.747 P2.15
RX2_IN: P2.13 U1.43 | length 20.2
  Top Layer w0.25: v2(31.152,10.309) U1.43
  Bottom Layer w0.25: v2(31.152,10.309) 31.067,10.224 31.067,8.409 34.597,4.879 39.512,4.879 40.824,3.567 44.691,3.567 P2.13
SCK: U1.15 U3.8 U4.1 U6.13 U7.1 | length 80.3
  Top Layer w0.2: U3.8 v2(13.577,19.909) ; v2(29.552,1.809) 29.652,1.909 U1.15 ; v2(29.902,-6.141) U4.1 ; U7.1 v2(31.402,-15.141)
  Top Layer w0.25: U6.13 38.052,20.209 v2(38.252,20.409)
  Bottom Layer w0.25: v2(31.402,-15.141) 31.402,-7.641 v2(29.902,-6.141) 29.552,-5.791 v2(29.552,1.809) 29.552,2.284 29.337,2.499 20.342,2.499 13.577,9.264 v2(13.577,19.909) 14.572,20.904 17.412,20.904 18.759,19.557 34.872,19.557 35.047,19.732 37.574,19.732 v2(38.252,20.409)
SWCLK: P2.9 U1.37 | length 16.4
  Top Layer w0.25: U1.37 34.152,12.589 34.872,13.309 v2(37.152,13.309)
  Bottom Layer w0.25: v2(37.152,13.309) 37.152,10.329 38.262,9.219 42.272,9.219 43.659,7.832 P2.9
SWDIO: P2.10 U1.34 | length 14.1
  Top Layer w0.25: U1.34 37.152,9.309 v2(37.652,8.809)
  Bottom Layer w0.25: v2(37.652,8.809) 42.102,8.809 44.352,6.559 46.772,6.559 P2.10
TEMP: U4.7 U5.2 | length 27.6
  Top Layer w0.25: U4.7 v2(39.802,-7.641)
  Top Layer w0.3: v2(24.102,-14.041) U5.2
  Bottom Layer w0.25: v2(24.102,-14.041) 25.802,-15.741 36.529,-15.741 37.302,-14.968 37.302,-11.801 39.802,-9.301 v2(39.802,-7.641)
TX1_IN: P2.16 U1.12 | length 22.8
  Top Layer w0.25: U1.12 v2(28.652,4.809)
  Bottom Layer w0.25: v2(28.652,4.809) 28.992,4.469 39.342,4.469 40.654,3.157 43.284,3.157 44.992,1.449 46.809,1.449 P2.16
TX2_IN: P2.14 U1.42 | length 22.2
  Top Layer w0.235: v2(31.652,9.309) 31.652,9.992 31.729,10.07 31.729,10.548 31.652,10.626 U1.42
  Bottom Layer w0.25: v2(31.652,9.309) 31.652,8.404 34.767,5.289 39.682,5.289 40.994,3.977 46.821,3.977 P2.14
VDD1: C3.1 C4.2 C5.2 C6.2 C7.2 C8.2 C16.1 C17.1 C18.1 C19.1 C20.1 C21.1 C22.1 L1.2 P2.21 P2.23 P2.25 P2.27 P2.29 P2.31 P2.33 P2.35 R1.2 R4.2 R9.2 U1.9 U1.24 U1.36 U1.48 U3.1 U3.2 U4.5 U4.8 U5.1 U6.5 U6.8 U7.8 | length 170.2
  Top Layer w0.235: U3.1 13.427,16.359 C17.1 11.902,17.009 14.252,17.009 14.827,16.434 U3.2 ; U1.9 25.452,6.309 24.852,5.709 24.852,1.017 25.61,0.259 C8.2 C7.2 C4.2 U1.24 ; U1.36 C5.2
  Top Layer w0.25: C18.1 U5.1 ; U1.48 C6.2 ; C19.1 34.852,-13.371 33.982,-14.241 33.982,-16.358 34.764,-17.141 U7.8 ; C20.1 34.852,-7.841 35.552,-7.141 U4.8 ; U6.5 37.552,16.459 ; C22.1 37.552,14.459 37.552,16.459 ; C21.1 37.552,16.459
  Top Layer w0.6: C3.1 27.102,15.859 C6.2
  Top Layer w1.6: v1(14.575,-15.398) 16.306,-15.398 17.771,-16.863 17.771,-23.723 19.236,-25.188 P2.35 P2.33 P2.31 P2.29 P2.27 P2.25 ; P2.23 P2.21
  Bottom Layer w1.6: v1(14.575,-15.398) 16.311,-15.398 17.766,-16.853 17.766,-23.713 19.241,-25.188 P2.35 P2.33 P2.31 P2.29 P2.27 P2.25 P2.23 P2.21
  other v1: 4.975,-15.398 6.575,-15.398 8.175,-15.398 11.375,-15.398 12.975,-15.398 8.975,-13.798 10.575,-13.798 12.175,-13.798 13.775,-13.798 15.375,-13.798 9.775,-12.198 11.375,-12.198 12.975,-12.198 14.575,-12.198 8.975,-10.598 10.575,-10.598 12.175,-10.598 13.775,-10.598 15.375,-10.598 9.775,-8.998 11.375,-8.998 12.975,-8.998 14.575,-8.998 5.775,-7.398 7.375,-7.398 8.975,-7.398 10.575,-7.398 12.175,-7.398 13.775,-7.398 15.375,-7.398
  other v2: 45.502,-17.641 45.302,-17.541
VSS1: C1.2 C2.2 C3.2 C4.1 C5.1 C6.1 C7.1 C8.1 C9.2 C10.2 C11.1 C13.2 C15.2 C16.2 C17.2 C18.2 C19.2 C20.2 C21.2 C22.2 C23.2 C24.2 C25.2 C26.2 C27.1 C28.1 D1.2 D2.2 P2.22 P2.24 P2.26 P2.28 P2.30 P2.32 P2.34 P2.36 P3.1 Q1.3 Q2.3 R2.1 R6.1 R7.2 R8.2 R16.1 R19.1 S1.2 U1.8 U1.23 U1.35 U1.47 U2.5 U3.3 U4.3 U5.3 U6.6 U6.7 U7.3 U8.4 | length 252.6
  Top Layer w0.25: C27.1 1.69,0 2.2,0.51 2.2,2.53 2.67,3 v2(3.5,3) ; v2(5.452,4.559) C10.2 9.502,4.609 C2.2@9.502,6.559 ; v2(5.452,6.559) C2.2 C2.2@9.502,6.559 ; v2(5.452,8.559) C1.2 C1.2@9.502,8.559 ; v2(5.452,10.559) C9.2 C1.2@9.502,8.559 ; v2(6.422,3.209) C11.1 7.972,1.709 S1.2 ; C17.2 12.099,17.412 15.149,17.412 16.077,16.484 U3.3 ; v2(20.702,-5.741) R7.2 ; U5.3 v2(23.152,-8.841) ; v2(25.902,-12.841) 27.402,-14.341 C23.2 ; U1.8 28.902,6.809 v2(29.152,7.059) ; C24.2 28.402,-19.241 v2(31.402,-19.241) ; v2(27.402,-6.641) 27.987,-7.226 29.144,-7.226 29.229,-7.141 U4.3 32.352,-7.141 32.952,-7.741 C20.2 ; U1.47 29.152,10.809 v2(29.902,10.059) ; v2(29.452,-10.391) 30.202,-11.141 C20.2 ; C8.1 C7.1 C4.1 ; R2.1 31.552,17.759 32.152,17.159 v2(32.152,15.859) ; U7.3 30.702,-17.141 30.502,-16.941 30.502,-14.391 31.752,-13.141 C19.2 C20.2 ; v2(33.402,1.809) 33.652,2.059 U1.23 ; v2(34.402,9.659) 34.552,9.809 U1.35 ; v2(36.302,-19.241) 39.302,-19.241 C25.2 ; U6.6 38.052,16.539 39.347,15.244 41.067,15.244 41.602,14.709 C21.2 C22.2 C5.1 ; U6.7 38.552,16.649 39.522,15.679 42.042,15.679 43.102,14.619 v2(43.102,10.309) ; C26.2 40.302,-13.491 41.302,-12.491 v2(41.302,-10.841) ; D1.2 v2(40.502,1.309) ; C2.2@9.502,6.559 C1.2@9.502,8.559
  Top Layer w0.3: C18.2 21.602,-10.641 21.902,-10.341 U5.3
  Top Layer w0.4: R16.1 0.665,4.115 U8.4 v2(2.165,6.45) ; C28.1 R19.1 v2(1.5,16.55) ; v2(9.842,19.909) 10.492,19.909 11.252,19.149 C17.2 ; C6.1 R2.1 ; C4.1 v2(35.652,-1.641) ; C5.1 v2(43.102,10.309)
  Top Layer w0.6: D2.2 -7.298,-4.241 ; v2(24.652,16.209) 24.652,17.371 25.49,18.209 C3.2 28.202,18.209 C6.1
  Top Layer w1.6: v1(12.975,-26.598) 13.825,-27.448 46.506,-27.448 48.046,-25.908 P2.36 P2.34 P2.32 P2.30 P2.28 P2.26 ; P2.24 P2.22
  Bottom Layer w1.6: v1(12.975,-26.598) 14.157,-27.78 46.168,-27.78 48.046,-25.903 P2.36 ; P2.34 P2.32 P2.30 P2.28 P2.26 P2.24 P2.22
  other v1: -28.625,-26.598 -27.025,-26.598 -25.425,-26.598 -23.825,-26.598 -22.225,-26.598 -20.625,-26.598 -19.025,-26.598 -17.425,-26.598 -15.825,-26.598 -14.225,-26.598 -12.625,-26.598 -11.025,-26.598 -9.425,-26.598 -7.825,-26.598 -6.225,-26.598 -4.625,-26.598 -3.025,-26.598 -1.425,-26.598 0.175,-26.598 1.775,-26.598 3.375,-26.598 4.975,-26.598 6.575,-26.598 8.175,-26.598 9.775,-26.598 11.375,-26.598 -27.825,-24.998 -26.225,-24.998 -24.625,-24.998 -23.025,-24.998 -21.425,-24.998 -19.825,-24.998 -18.225,-24.998 -16.625,-24.998 -15.025,-24.998 -13.425,-24.998 -11.825,-24.998 -10.225,-24.998 -8.625,-24.998 -7.025,-24.998 -5.425,-24.998 -3.825,-24.998 -2.225,-24.998 -0.625,-24.998 0.975,-24.998 2.575,-24.998 4.175,-24.998 5.775,-24.998 7.375,-24.998 8.975,-24.998 10.575,-24.998 12.175,-24.998 13.775,-24.998 15.375,-24.998 -23.825,-23.398 -22.225,-23.398 -20.625,-23.398 -19.025,-23.398 -17.425,-23.398 -15.825,-23.398 -14.225,-23.398 -12.625,-23.398 -11.025,-23.398 -9.425,-23.398 -7.825,-23.398 -6.225,-23.398 -4.625,-23.398 -3.025,-23.398 -1.425,-23.398 0.175,-23.398 1.775,-23.398 3.375,-23.398 4.975,-23.398 6.575,-23.398 8.175,-23.398 9.775,-23.398 11.375,-23.398 12.975,-23.398 14.575,-23.398 -23.025,-21.798 -21.425,-21.798 -19.825,-21.798 -18.225,-21.798 -16.625,-21.798 -8.625,-21.798 -7.025,-21.798 -5.425,-21.798 -3.825,-21.798 -2.225,-21.798 -0.625,-21.798 0.975,-21.798 2.575,-21.798 4.175,-21.798 5.775,-21.798 7.375,-21.798 8.975,-21.798 10.575,-21.798 12.175,-21.798 13.775,-21.798 15.375,-21.798 -23.825,-20.198 -22.225,-20.198 -20.625,-20.198 -7.825,-20.198 -6.225,-20.198 -4.625,-20.198 -3.025,-20.198 -1.425,-20.198 0.175,-20.198 11.375,-20.198 12.975,-20.198 14.575,-20.198 -27.825,-18.598 -26.225,-18.598 -24.625,-18.598 -23.025,-18.598 -21.425,-18.598 -16.625,-18.598 2.575,-18.598 4.175,-18.598 5.775,-18.598 7.375,-18.598 12.175,-18.598 13.775,-18.598 15.375,-18.598
pads on no net: P2.1 P2.2 P2.3 P2.4 P2.5 P2.6 P2.7 P2.8 U1.1 U1.4 U1.10 U1.11 U1.14 U1.22 U1.25 U1.26 U1.27 U1.28 U1.33 U1.38 U1.39 U1.40 U1.41 U1.45 U1.46 U4.6 U6.2 U6.3 U6.4 U6.9 U6.10 U6.11 Y1.2 Y1.3

## Polygon pours and split planes (outlines as drawn)
VDD1 on Top Layer "vccplane" (solid, pour order 44): 16.022,-5.608 16.022,-26.05 49.776,-26.05 49.776,19.402 ccw(c47.793,19.402) 47.793,21.385 -5.848,21.385 -5.848,-5.608
VSS1 on Top Layer "VSS1_L01_P042" (solid, pour order 42): -13.65,18.3 -6.55,18.3 -6.55,-3 3.65,-3 3.65,-18.8 -1.35,-18.8 -1.35,-5.2 -13.65,-5.2
NetC12_2 on Top Layer "NETC12_2_L01_P022" (solid, pour order 32): -13.753,-16.918 -13.733,-5.608 -1.903,-5.608 -1.903,-16.918 -13.353,-16.918
VSS1 on Top Layer "VSS1_L01_P026" (solid, remove dead copper, pour order 26): -29.918,-17.118 -29.918,-26.992 ccw(c-28.682,-26.991) -28.682,-28.228 16.022,-28.228 16.022,-17.118 7.247,-17.118 7.247,-17.718 -4.953,-17.718 -4.953,-17.118 -12.504,-17.118 cw(c-12.504,-16.919) -12.703,-16.919 -12.703,-15.698 -13.103,-15.698 -13.103,-16.918 cw(c-13.303,-16.918) -13.303,-17.118
VDD1 on Top Layer "SENSE_BUS_L01_P024" (solid, remove dead copper, pour order 24): 4.172,-16.918 4.192,-5.608 16.022,-5.608 16.022,-16.918 4.572,-16.918
LoadIN on Top Layer "VBAT_L01_P018" (solid, remove dead copper, pour order 18): -29.918,-5.608 -29.918,-16.918 -14.003,-16.918 -14.003,-5.608
VSS1 on Bottom Layer "gndplane" (solid, pour order 46): -5.848,-5.743 -1.34,-5.743 -1.34,-24.865 3.64,-24.865 3.64,-5.743 15.91,-5.743 15.91,-27.76 46.88,-27.76 ccw(c46.88,-24.865) 49.775,-24.865 49.775,19.403 ccw(c47.792,19.403) 47.792,21.386 -5.848,21.386
VSS1 on Bottom Layer "VSS1_L01_P026" (solid, pour order 36): -29.918,-17.118 -29.918,-26.991 ccw(c-28.682,-26.991) -28.682,-28.228 16.022,-28.228 16.022,-17.118 7.247,-17.118 7.247,-17.718 -4.953,-17.718 -4.953,-17.118 -12.504,-17.118 cw(c-12.504,-16.919) -12.703,-16.919 -12.703,-15.698 -13.103,-15.698 -13.103,-16.918 cw(c-13.303,-16.918) -13.303,-17.118
NetC12_2 on Bottom Layer "NETC12_2_L01_P022" (solid, pour order 22): -13.753,-16.918 -13.733,-5.608 -1.903,-5.608 -1.903,-16.918 -13.353,-16.918
LoadIN on Bottom Layer "VBAT_L01_P018" (solid, pour order 30): -29.918,-5.608 -29.918,-16.918 -14.003,-16.918 -14.003,-5.608
VDD1 on Bottom Layer "SENSE_BUS_L01_P024" (solid, pour order 34): 4.172,-16.918 4.192,-5.608 16.022,-5.608 16.022,-16.918 4.572,-16.918

## Other copper
Top Layer:
  rectangle net VSS1: 47.246,-13.278 48.846,-9.218
  rectangle net VDD1: 44.706,-12.869 46.296,-8.932
Bottom Layer:
  rectangle net VSS1: 47.236,-25.173 48.846,-21.673

## Silkscreen, mask and mechanical layers (free items; w line width, h text height)
Top Overlay:
  lines w0.2: -30.024,-26.398 ccw(c-28.024,-26.398) -28.024,-28.398 47.576,-28.398 ccw(c47.576,-26.398) 49.576,-26.398 49.576,19.202 ccw(c47.576,19.202) 47.576,21.202 -28.024,21.202 ccw(c-28.024,19.202) -30.024,19.202 -30.024,-26.398
  text "FUNYE2" at -27.1,20 h1.8 r270
  text "FUNYE1" at -27.1,7.55 h1.8 r270
  text "Roket Kontrol Unitesi / V2.0 @GTU Roket Takimi" at 20.402,-27.841 h1
Bottom Overlay:
  lines w0.2: -30.024,-26.398 ccw(c-28.024,-26.398) -28.024,-28.398 47.576,-28.398 ccw(c47.576,-26.398) 49.576,-26.398 49.576,19.202 ccw(c47.576,19.202) 47.576,21.202 -28.024,21.202 ccw(c-28.024,19.202) -30.024,19.202 -30.024,-26.398
Mechanical 1:
  circle w0.001: c7.276,-7.098 r0
  circle w0.001: c9.776,-3.598 r0
  circle w0.001: c9.776,-3.598 r0
  lines w0.001: -30.224,-26.598 ccw(c-28.224,-26.598) -28.224,-28.598 47.776,-28.598 ccw(c47.776,-26.598) 49.776,-26.598 49.776,19.402 ccw(c47.776,19.402) 47.776,21.402 -28.224,21.402 ccw(c-28.224,19.402) -30.224,19.402 -30.224,-26.598

## Text inside footprints (layer, text, board x,y; h text height)
P2: Top Overlay "36" at 47.213,-27.298 h1; Top Overlay "1" at 45.339,19.002 h1